# Altium PCB boost_new.PcbDoc
Units mil, origin at the board's own origin, x right, y up, seen from the top; angles counter-clockwise.
Board outline 1860.03 x 1010.03 mil, 2 copper layers (Top Layer, Bottom Layer); 12 components, 7 nets, 33 pads, 0 vias.
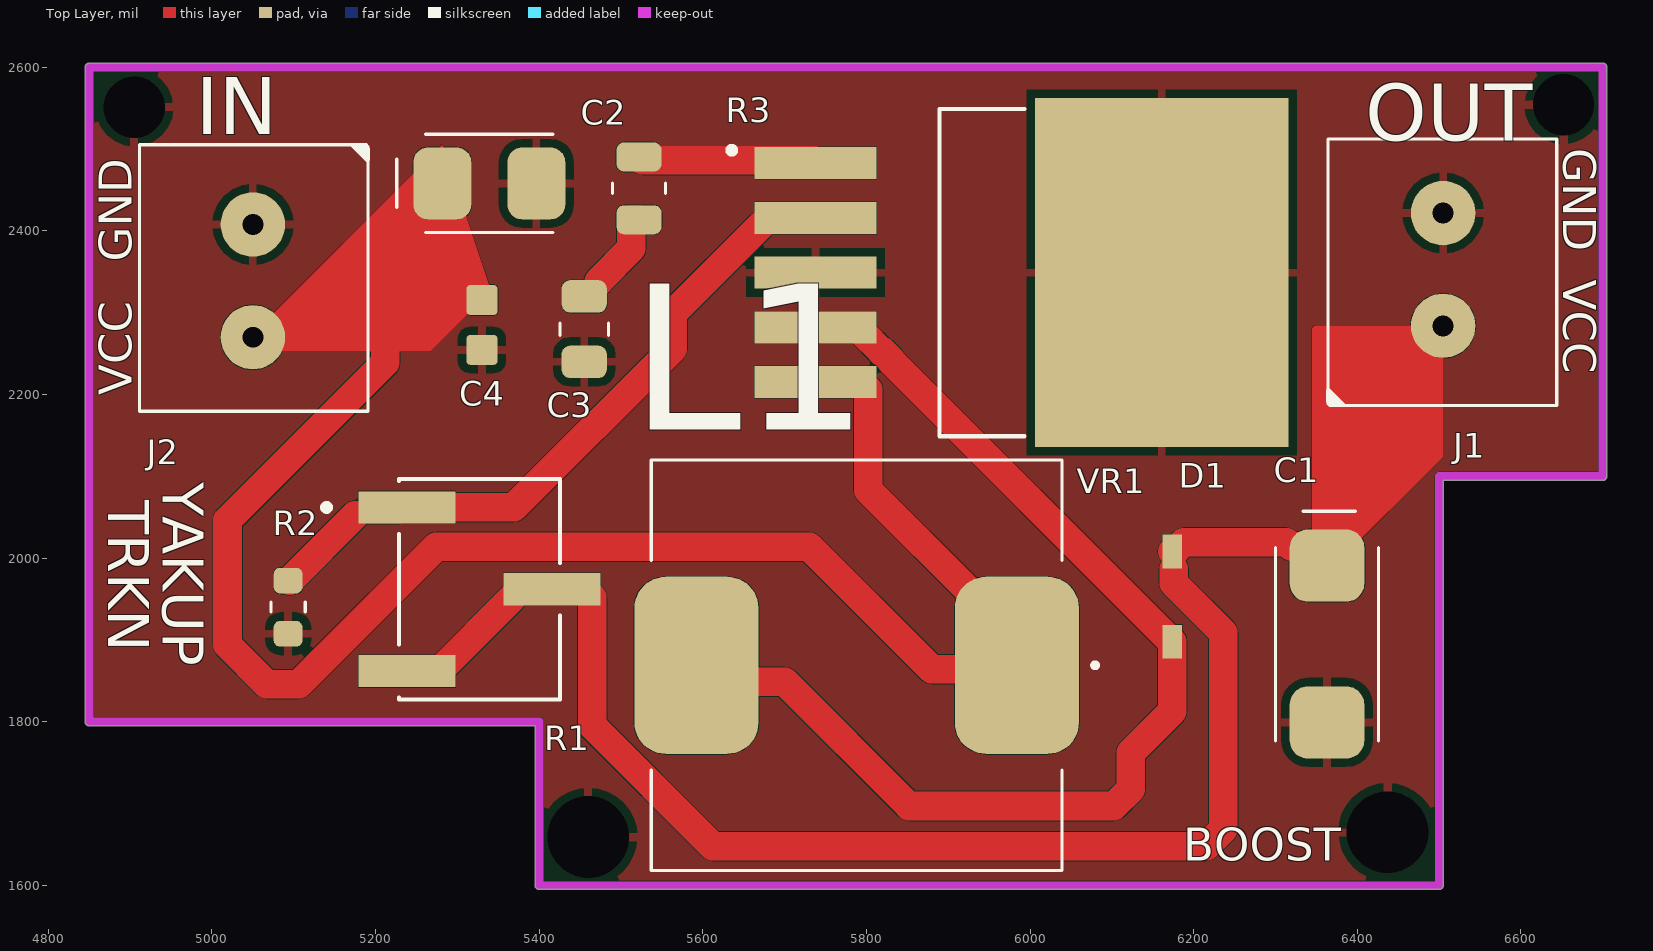
[diagram p0: Top Layer view]
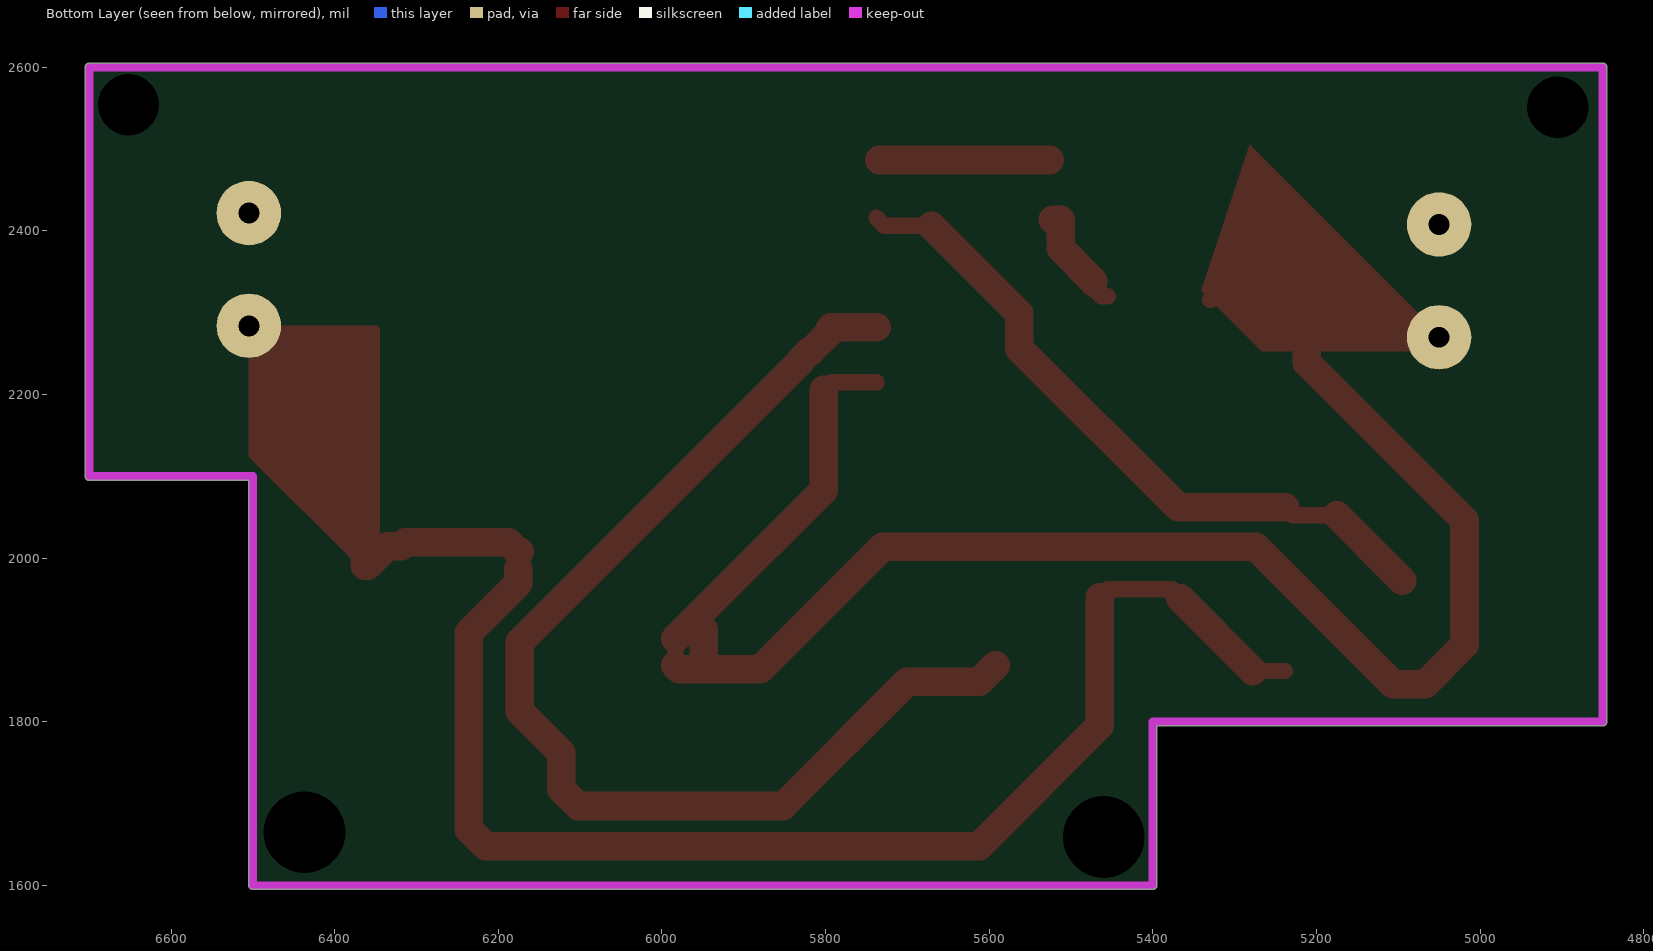
[diagram p1: Bottom Layer view, seen from below]
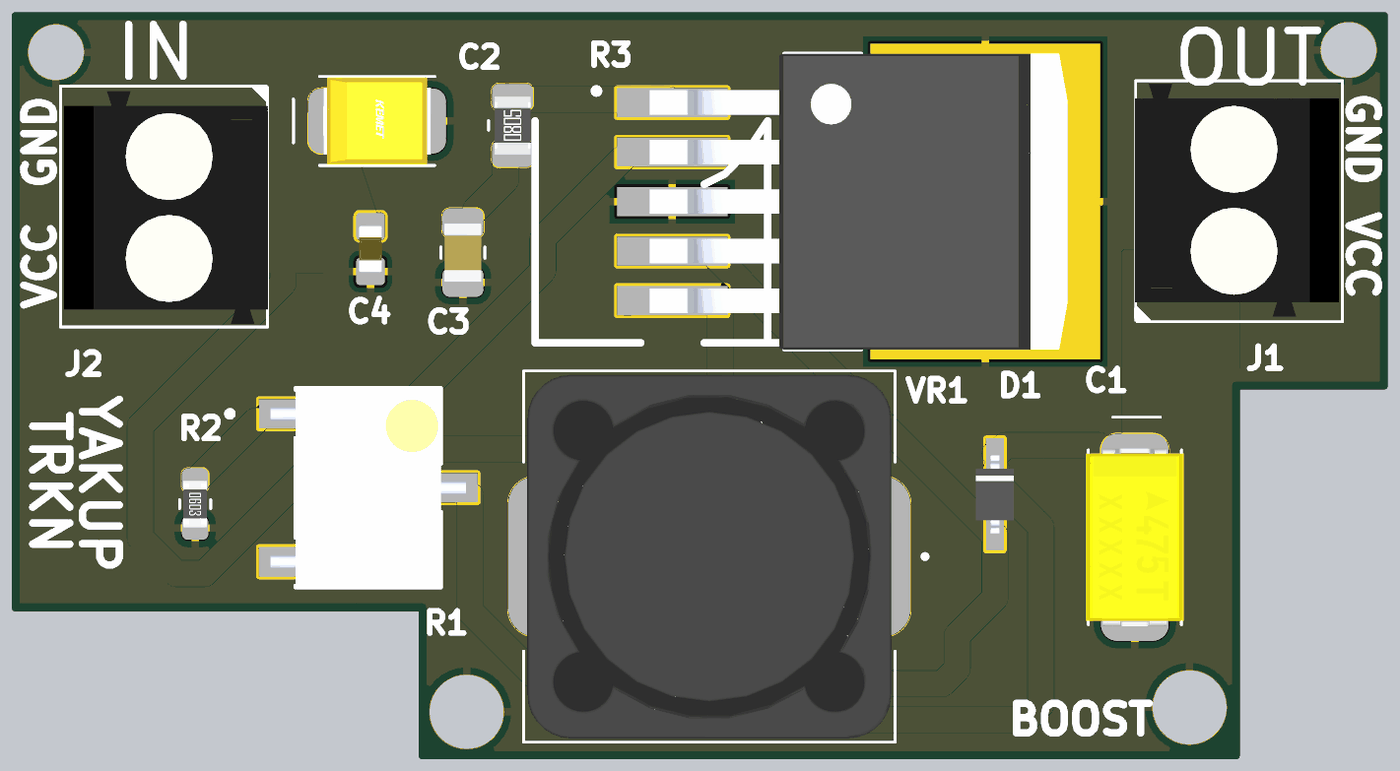
[diagram p2: 3D render of the assembled board from above, using the file's embedded part models]

## Layer stack, top to bottom
Top Solder: solder mask 0.4, Solder Resist, Dk 3.5
Top Layer: signal copper 1.4
Dielectric 1: dielectric 12.6, FR-4, Dk 4.8
Bottom Layer: signal copper 1.4
Bottom Solder: solder mask 0.4, Solder Resist, Dk 3.5

## Board outline
4844.98,1800 ccw(c4850,1800) 4850,1794.98 5394.98,1794.98 5394.98,1600 ccw(c5400,1600) 5400,1594.98 6500,1594.98 ccw(c6500,1600) 6505.02,1600 6505.02,2094.99 6700,2094.99 ccw(c6700,2100) 6705.02,2100 6705.02,2600 ccw(c6700,2600) 6700,2605.01 4850,2605.01 ccw(c4850,2600) 4844.98,2600

## Design rules (kind name [scope] priority, off if disabled: settings)
Clearance [All] p1: gap=0.5 ignorepadtopadclearanceinfootprint=FALSE except(0: Arc-Hole Track-Hole SMDPad-Hole THPad-Hole Via-Hole Fill-Hole Poly-Hole Region-Hole Text-Hole)
HoleToHoleClearance [All] p1: gap=2 allowstackedmicrovias=TRUE
MinimumSolderMaskSliver [All] p1: minsoldermaskwidth=2
PolygonConnect [All] p1: connectstyle=Relief reliefconductorwidth=10 reliefentries=4 polygonreliefangle="90 Angle" airgapwidth=10
RoutingVias [All] p1: holewidth=28 width=50 viastyle="Through Hole" minholewidth=28 minwidth=50 maxholewidth=28 maxwidth=50
SilkToSilkClearance [All] p1: silktosilkclearance=0.2
SilkToSolderMaskClearance [IsPad] p1: minsilkscreentomaskgap=0 clearancetoexposedcopper=TRUE
SolderMaskExpansion [All] p1: expansion=4 istentingtop=FALSE
Width [All] p1: maxlimit=40 minlimit=10 preferedwidth=20
26 further rules are at their usual default settings.

## Components (designator, comment, footprint, x,y, rotation, side; value= is the part's Value field where it differs from the comment)
C1 "TAJC227M010RNJ" KYOCERA_CAP_TAN-C 6363,1895 r270 top
C2 "T491B106M016AT" KEMET_CAP_TAN-B 5339,2458 r0 top
C3 "CL21B334KOCNNNC" SAMSUNG_CAP_0805_095 5455,2280 r90 top
C4 "100unF" CAPC1608X92N 5330,2285 r90 top
D1 "1N4148WS" SODFL2512X100N 6174,1953 r270 top
J1 "OUT" "Klemens 1x2 - 3.5mm" 6503,2347 r90 top
J2 "POWER_IN" "Klemens 1x2 - 3.5mm" 5051.97,2344.8 r270 top
L1 "DR127-101-R" EATON_DR127 5788,1869 r180 top
R1 "TS63Y103KT20" TRIM_TS63Y103KT20 5327,1962 r0 top
R2 "0603SAJ0202T5E" ROYALOHM_RES_0603 5093,1940 r270 top
R3 "0805S8J0222T5E" ROYALOHM_RES_0805 5522,2452 r90 top
VR1 "LM2577S-ADJ" TO170P1524X483-6N 5989.74,2349 r0 top

## Footprints (in the part's own frame and the unit in brackets; to place one, negate y for a bottom-side part, rotate by r counter-clockwise, add the part's x,y. Pads: shape width x height; smd on the part's side, far side on the other; paste and mask are expansions set on the pad)
CAPC1608X92N [mm]
  rrect25% 0.92x0.97 smd: 1(-0.775,0) 2(0.775,0)
  body extent -0.8,-0.4 0.8,0.4, height 0.87
EATON_DR127 [mm]
  rrect50% 3.85x5.5 smd mask+0.04: 1(-4.975,0) 2(4.975,0)
  silkscreen extent -7.48,-6.38 6.38,6.38, body extent -6.25,-6.25 6.25,6.25, height 8
KEMET_CAP_TAN-B [mm]
  rrect50% 1.8x2.23 smd paste+0 mask+0.04: 1(-1.46,0) 2(1.46,0)
  silkscreen extent -2.88,-1.53 1.98,1.53, body extent -1.85,-1.5 1.85,1.5, height 2.1
"Klemens 1x2 - 3.5mm" [mm]
  round 2 hole 0.65: 1(-1.6,-0.05) 2(1.9,-0.05)
  silkscreen extent -4.11,-3.58 4.2,3.58, body extent -3.9,-3.45 4.09,3.55, height 8.9
KYOCERA_CAP_TAN-C [mm]
  rrect50% 2.24x2.32 smd mask+0.04: 1(-2.435,0) 2(2.435,0)
  silkscreen extent -4.13,-1.6 3,1.6, body extent -3.05,-1.68 3.05,1.68, height 2.7
ROYALOHM_RES_0603 [mm]
  rrect50% 0.8x0.9 smd paste+0 mask+0.04: 1(-0.825,0) 2(0.825,0)
  silkscreen extent -0.15,-0.53 0.15,0.53, body extent -0.8,-0.4 0.8,0.4, height 0.45
ROYALOHM_RES_0805 [mm]
  rrect50% 0.9x1.397 smd paste+0 mask+0.04: 1(-0.975,0) 2(0.975,0)
  silkscreen extent -0.16,-0.83 0.16,0.83, body extent -1,-0.62 1,0.63, height 0.6
SAMSUNG_CAP_0805_095 [mm]
  rrect50% 1x1.4 smd paste+0 mask+0.04: 1(-1.016,0) 2(1.016,0)
  silkscreen extent -0.19,-0.75 0.19,0.75, body extent -1,-0.63 1,0.64, height 0.96
SODFL2512X100N [mm]
  rect 1.05x0.6 smd: A(1.4,0) C(-1.4,0)
  body extent -1.34,-0.65 1.34,0.65, height 1.15
TO170P1524X483-6N [mm]
  rect 3.79x0.99 smd: 1(-6.4,3.4) 2(-6.4,1.7) 3(-6.4,0) 4(-6.4,-1.7) 5(-6.4,-3.4)
  rect 7.88x10.84 smd paste-6: 6(4.35,0)
  silkscreen extent -9.1,-5.08 0.09,5.08, body extent -7.18,-5.08 7.18,5.08, height 4.65
TRIM_TS63Y103KT20 [mm]
  rect 3x1 smd: 1(-2.25,2.54) 2(2.25,0) 3(-2.25,-2.54)
  silkscreen extent -4.85,-3.42 2.5,3.42, body extent -3.35,-3.42 3.35,3.42, height 8

## Part data
C1: "CAP TANT 220UF 20% 10V 2312", Capacitance="220 µF", Supplier Part Number 1=478-8899-1-ND, Supplier 1=Digi-Key, Supplier 2=Mouser, Supplier 3="Arrow Electronics", Supplier Part Number 2=581-TAJC227M010RNJ, Supplier Part Number 3=TAJC227M010RNJ
C2: "CAP TANT 10UF 20% 16V 1411", Capacitance="10 µF", Supplier Part Number 1=399-3708-1-ND, Supplier 1=Digi-Key, Supplier 2=Farnell, Supplier 3=Mouser, Supplier Part Number 2=2462772, Supplier Part Number 3=80-T491B106M016
C3: "CAP CER 0.33UF 16V X7R 0805", Capacitance="330 nF", Supplier Part Number 1=1276-1797-1-ND, Supplier 1=Digi-Key, Supplier 2=Mouser, Supplier 3="Arrow Electronics", Supplier Part Number 2=187-CL21B334KOCNNNC, Supplier Part Number 3=CL21B334KOCNNNC
C4: library part VJ0603Y104KLXAC5G, "Multilayer Ceramic Capacitors MLCC - SMD/SMT 100nF 25volts 10%", Package=None, Availability=Unavailable, MF="{'manufacturer': u'Vishay'}", MP=VJ0603Y104KLXAC5G, Price=None
D1: "1N4148WS Series 75 V 300 mA Surface Mount Small Signal Diodes - SOD-323F", Package=None, Availability=Unavailable, MF="{'manufacturer': u'ON'}", MP=1N4148WS, Price=None
J1 J2: library part "Klemens 1x2 3.5mm", "Klemens 1x2 3.5mm"
L1: "FIXED IND 100UH 1.96A 163 MOHM", Supplier Part Number 1=513-1038-1-ND, Inductance="100 µH", Supplier 1=Digi-Key, Supplier 2=Farnell, Supplier 3=Mouser, Supplier 4="Arrow Electronics", Supplier Part Number 2=3650504, Supplier Part Number 3=704-DR127-101-R, Supplier Part Number 4=DR127-101-R
R1 VR1: Package=None, Availability=Unavailable, Price=None
  R1: MF="{'manufacturer': u'Vishay'}", MP=TS63Y103KT20
  VR1: MF="{'manufacturer': u'Texas Instruments'}", MP=LM2577S-ADJ
R2: "RES SMD 2K OHM 5% 1/10W 0603", Resistance="2 k"
R3: "RES SMD 2.2K OHM 5% 1/8W 0805", Resistance="2.2 k"

## Free pads (board coordinates)
  round 0 hole 75: 5(4905,2551) 5(6652,2554)
  round 0 hole 100: 5(5460,1659) 5(6437,1665)

## Nets (pads, with @x,y where several pads share a name; then routed paths per layer and width w, separated by ;. In a path a pad name is that pad's centre, name@x,y a point inside that pad or via, vN(x,y) a via of type N, cw(c..) or ccw(c..) an arc to the next point about the centre after c; other vN are vias at no path point)
GND: C1.2 C2.2 C3.1 C4.1 J1.2 J2.1 pad.5 R2.2 VR1.3 VR1.6
NetC1_1: C1.1 D1.C J1.1 R1.2 R1.3 | length 2190.5
  Top Layer w20: R1.3 R1.3@5277.79,1862 ; R1.2@5366.53,1950.74 5366.53,1952.31 5376.21,1962 R1.2 5454.95,1962 R1.2@5464.64,1952.31 ; 6175.81,1987.19 D1.C@6175.81,2006.31 ; C1.1@6359.75,1990.87 C1.1
  Top Layer w35: R1.3@5277.79,1862 R1.2@5366.53,1950.74 ; R1.2@5464.64,1952.31 5464.64,1795.36 5612,1648 6215.5,1648 6236,1668.5 6236,1909 6175.81,1969.19 6175.81,1987.19 ; D1.C 6176.52,2008.12 6187.64,2019.23 6313.88,2019.23 6318.46,2014.65 6335.96,2014.65 C1.1@6359.75,1990.87 ; C1.1 6363,2142.04 J1.1
NetC2_1: C2.1 C4.2 J2.2 L1.1 VR1.5 | length 2319.7
  Top Layer w20: 5212,2270 5253,2311 ; C2.1 5281.52,2363.01 5329.02,2315.51 C4.2 ; VR1.5 5792.89,2215.14 VR1.5@5802.38,2205.65 ; L1.1 L1.1@5983.87,1901.48
  Top Layer w35: 5212,2270 5212,2239.19 5019,2046.19 5019,1894 5067,1846 5106,1846 5274,2014 5730,2014 5880,1864 5978.87,1864 L1.1 ; VR1.5@5802.38,2205.65 5802.38,2082.97 5938.93,1946.42 5960.8,1924.55 L1.1@5983.87,1901.48 ; L1.1@5949,1869 L1.1@5949,1912.75
NetC3_2: C3.2 R3.1 | length 131.3
  Top Layer w20: C3.2 5462.87,2320 5472.56,2329.69 C3.2@5472.56,2337.56
  Top Layer w35: C3.2@5472.56,2337.56 5472.56,2338.56 5512.67,2378.67 5512.67,2413.4 5512.89,2413.61 R3.1
NetD1_A: D1.A L1.2 VR1.4 | length 1465.8
  Top Layer w20: VR1.4 VR1.4@5792.89,2282.07
  Top Layer w35: L1.2 5612.05,1849.08 5699.92,1849.08 5852,1697 6102.5,1697 6123,1717.5 6123,1762 6174,1813 D1.A 6173.12,1897.88 5830.38,2240.62 5830.38,2242.09 5819.83,2252.63 5818.37,2252.63 5794.88,2276.12 5794.88,2280.08 5792.89,2282.07 VR1.4
NetR1_1: R1.1 R2.1 VR1.2 | length 853.6
  Top Layer w20: R2.1 R2.1@5094.97,1972.48 ; 5174.8,2052.31 5228.73,2052.31 R1.1 ; VR1.2@5670.44,2406.44 5728.28,2406.44 VR1.2
  Top Layer w35: R2.1@5094.97,1972.48 5174.8,2052.31 ; R1.1 5369,2062 5563,2256 5563,2299 VR1.2@5670.44,2406.44
NetR3_2: R3.2 VR1.1 | length 213.6
  Top Layer w20: R3.2 R3.2@5525.76,2486.62
  Top Layer w35: R3.2@5525.76,2486.62 VR1.1@5734.01,2486.62

## Polygon pours and split planes (outlines as drawn)
GND on Top Layer "GND_L01_P001" (solid, pour order 1): 4850.12,2604.15 6700.12,2604.15 6700.12,2104.15 6500.12,2104.15 6500.12,1604.15 5400.12,1604.15 5400.12,1804.15 4850.12,1804.15
no net on Top Layer "NONET_L01_P000" (solid, pour order 0): 4850,2600

## Keep-outs
Keep-Out Layer:
  lines w10: 4850,1800 5400,1800 5400,1600 6500,1600 6500,2100 6700,2100 6700,2600 4850,2600 4850,2500 4850,1800

## Other copper
Top Layer:
  region net NetC1_1: 6372,1991 6504.97,2123.97 6504.97,2284.01 6348.01,2284.01 6345,2281 6345,1986
  region net NetC2_1: 5281.25,2505.25 5029,2253 5266.5,2253 5340.63,2327.12
  region: 5050,2270
  region: 5404,2377
  region: 5538,2539
  region: 5522,2490.39

## Silkscreen, mask and mechanical layers (free items; w line width, h text height)
Top Overlay:
  text "IN" at 4980,2518 h70
  text "OUT" at 6410,2510 h70
  text "GND" at 6652,2501 h40 r270
  text "GND" at 4902,2362 h40 r90
  text "VCC" at 6652,2340 h40 r270
  text "VCC" at 4902,2199 h40 r90
  text "YAKUP" at 4940,2093 h50 r270
  text "TRKN" at 4873,2071 h50 r270
  text "BOOST" at 6187,1630 h40